# Altium PCB Relay_Controller_REV5.PcbDoc
Units mm, origin at the board's own origin, x right, y up, seen from the top; angles counter-clockwise.
Board outline 129.29 x 167.89 mm, 2 copper layers (Top Layer, Bottom Layer), stack 1.65 mm thick; 44 components, 29 nets, 116 pads, 135 vias.
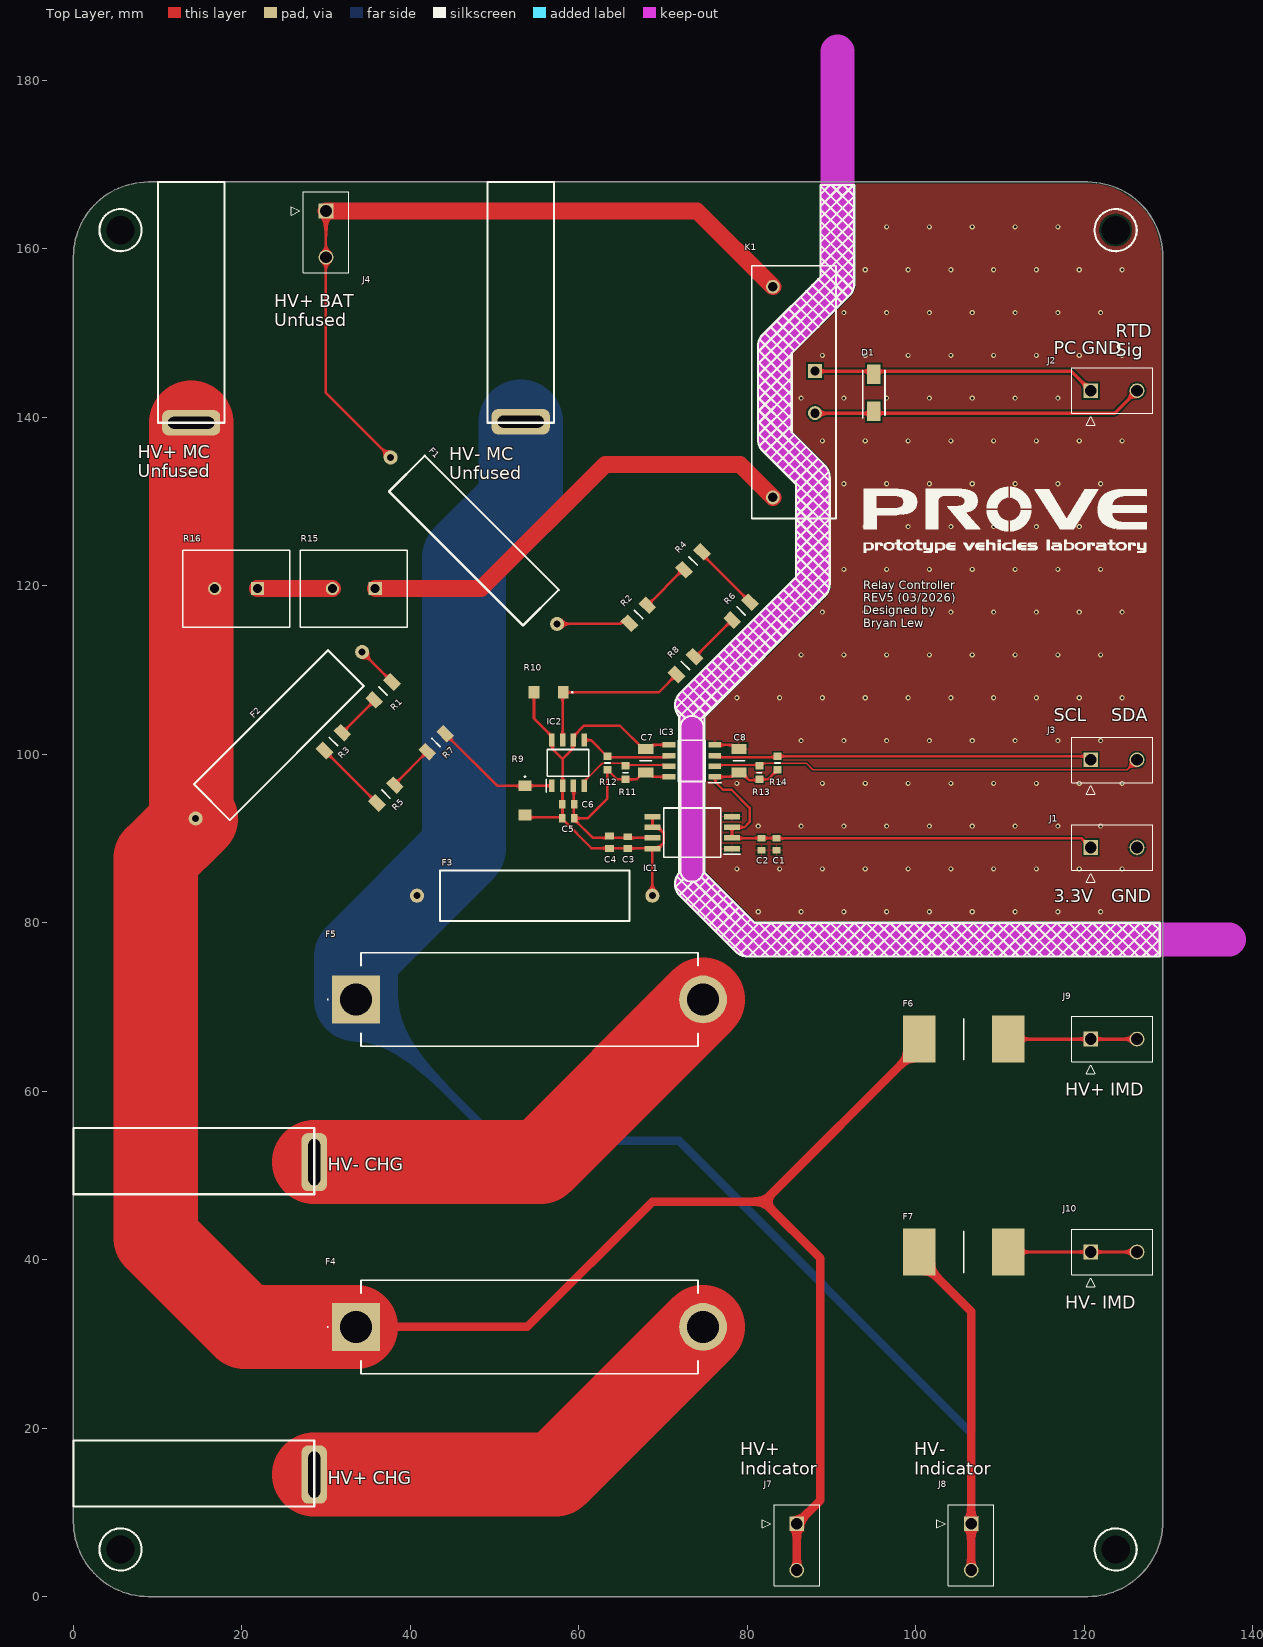
[diagram p0: Top Layer view]
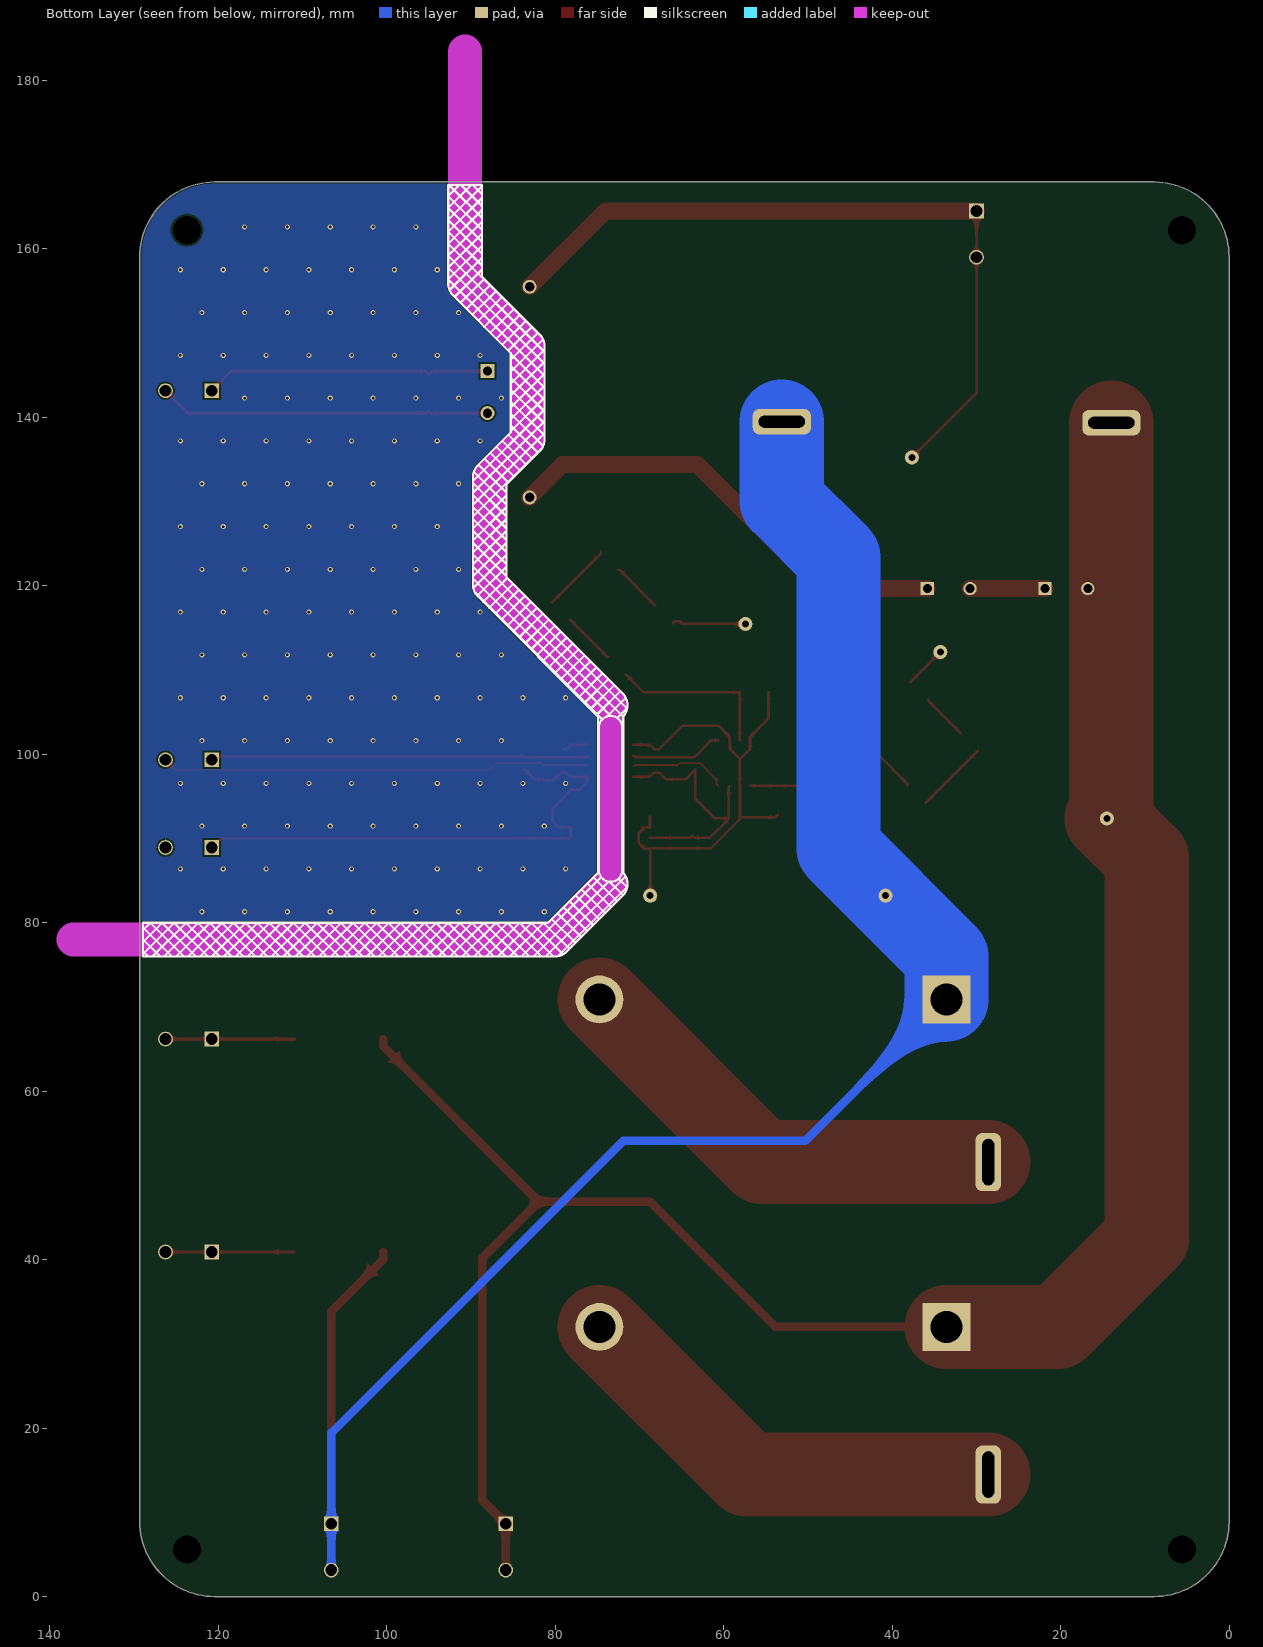
[diagram p1: Bottom Layer view, seen from below]
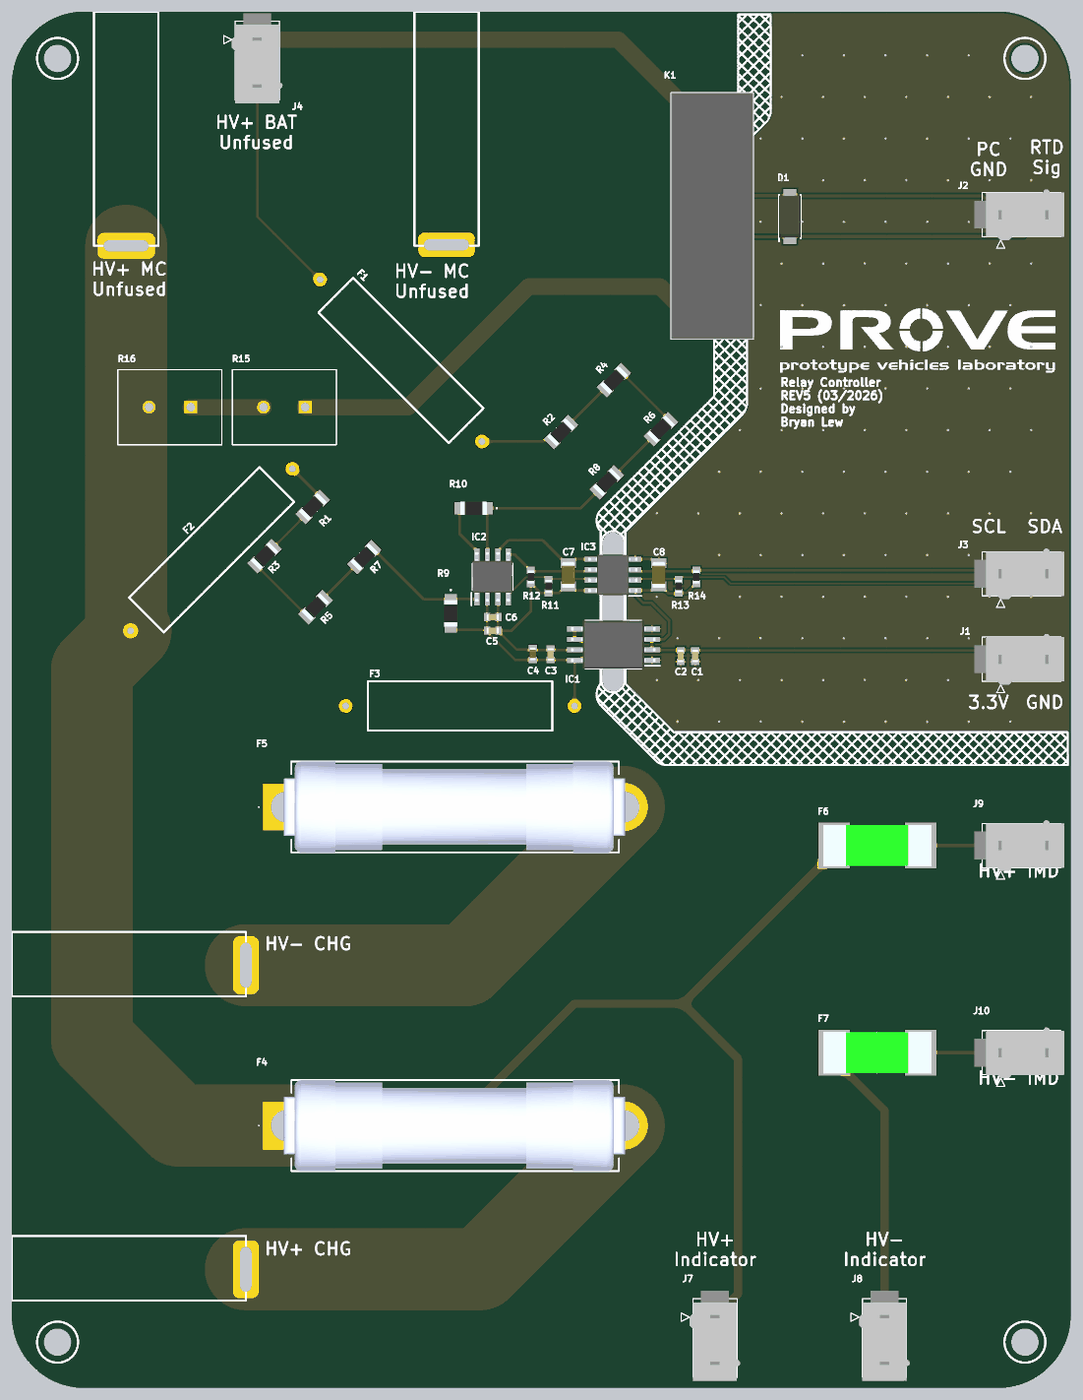
[diagram p2: 3D render of the assembled board from above, using the file's embedded part models]

## Layer stack, top to bottom
Top Solder: solder mask 0.0127, Solder Resist, Dk 3.8
Top Layer: signal copper 0.075
Dielectric: core 1.5, FR-4, Dk 4.5
Bottom Layer: signal copper 0.075
Bottom Solder: solder mask 0.0127, Solder Resist, Dk 3.8

## Board outline
0,8.89 0,159.004 cw(c8.89,159.004) 8.89,167.894 120.396,167.894 cw(c120.396,159.004) 129.286,159.004 129.286,8.89 cw(c120.396,8.89) 120.396,0 8.89,0 cw(c8.89,8.89)
cut-out: 72.156,86.233 ccw(c73.406,86.233) 74.656,86.233 74.656,103.124 ccw(c73.406,103.124) 72.156,103.124

## Design rules (kind name [scope] priority, off if disabled: settings)
BoardOutlineClearance [All] p1: gap=0.2 ignorepadtopadclearanceinfootprint=FALSE
Clearance [All] p1: gap=0.203 ignorepadtopadclearanceinfootprint=FALSE except(0.25: Arc-Hole Track-Hole SMDPad-Hole THPad-Hole Via-Hole Fill-Hole Poly-Hole Region-Hole Text-Hole)
ComponentClearance [All] p1: gap=0.127 collisioncheckmode=3 verticalgap=0.127 showdistances=TRUE
DiffPairsRouting [All] p1: maxlimit=0.381 minlimit=0.203 mostfreqgap=0.203 toplayer_minwidth=0.203 toplayer_maxwidth=25.4 toplayer_prefwidth=0.203 bottomlayer_minwidth=0.203 bottomlayer_maxwidth=25.4 bottomlayer_prefwidth=0.203 maxuncoupledlength=12.7
Height [All] p1: minheight=0 maxheight=1816.048 prefheight=12.7
HoleSize [All] p1: absolutevalues=TRUE maxlimit=6.3 minlimit=0.3 maxpercent=80.000 minpercent=20.000
HoleToHoleClearance [All] p1: gap=0.25 allowstackedmicrovias=FALSE
MinimumAnnularRing [All] p1: minimumring=0.076
MinimumSolderMaskSliver [All] p1: minsoldermaskwidth=0
PlaneClearance [All] p1: clearance=0.203
PlaneConnect PlaneConnectPowerPads [InPadClass('PowerPads')] p1: planeconnectstyle=Direct reliefexpansion=0.508 reliefentries=4 reliefconductorwidth=0.254 reliefairgap=0.254
PlaneConnect [All] p2: pad.planeconnectstyle=Relief pad.reliefexpansion=0.3 pad.reliefentries=4 pad.reliefconductorwidth=0.203 pad.reliefairgap=0.203 via.planeconnectstyle=Direct via.reliefexpansion=0.3 via.reliefentries=4 via.reliefconductorwidth=0.127 via.reliefairgap=0.127
PolygonConnect PolygonConnectPowerPads [All vs (InPadClass('PowerPads'))] p1: connectstyle=Direct reliefconductorwidth=0.254 reliefentries=4 polygonreliefangle="90 Angle" airgapwidth=0.254
PolygonConnect [All] p2: thpad.connectstyle=Relief thpad.reliefconductorwidth=0.203 thpad.reliefentries=4 thpad.polygonreliefangle="90 Angle" thpad.airgapwidth=0.203 smdpad.connectstyle=Relief smdpad.reliefconductorwidth=0.203 smdpad.reliefentries=4 smdpad.polygonreliefangle="90 Angle" smdpad.airgapwidth=0.203 via.connectstyle=Direct via.reliefconductorwidth=0.127 via.reliefentries=4 via.polygonreliefangle="90 Angle" via.airgapwidth=0.127
RoutingVias [All] p1: holewidth=0.3 width=0.6 viastyle="Through Hole" minholewidth=0.3 minwidth=0.6 maxholewidth=0.6 maxwidth=6.6
SilkToSilkClearance [All] p1: silktosilkclearance=0
SilkToSolderMaskClearance [IsPad] p1: minsilkscreentomaskgap=0.127 clearancetoexposedcopper=TRUE
SolderMaskExpansion [All] p1: expansion=0.075 istentingtop=FALSE
SupplyNets "Schematic Supply Nets" [InNet('GND')] p1: voltage=0.000
Width [All] p1: maxlimit=25.4 minlimit=0.203 preferedwidth=0.203 minimp=50.000000 maximp=50.000000 favimp=50.000000
20 further rules are at their usual default settings.

## Classes and differential pairs
component class VoltageSense: C5 C6 C7 C8 IC2 IC3 R1 R2 R3 R4 R5 R6 R7 R8 R9 R10 R11 R12 R13 R14
component class "Relay Controller": D1 K1 R15 R16
component class Connectors: F1 F2 F3 F4 F5 F6 F7 J1 J2 J3 J4 J7 J8 J9 J10
component class "3.3V Isolation": C1 C2 C3 C4 IC1

## Components (designator, comment, footprint, x,y, rotation, side; value= is the part's Value field where it differs from the comment)
C1 "10u" CAPC1608X90N 83.439,89.281 r270 top
C2 "100n" CAPC1608X90N 81.661,89.281 r270 top
C3 "100n" CAPC1608X90N 65.786,89.49 r270 top
C4 "22u" CAPC1608X105N 63.627,89.535 r270 top
C5 "10u" CAPC1608X90N 58.726,92.37 r180 top
C6 "100n" CAPC1608X90N 58.726,94.021 r180 top
C7 "100n" CAPC3216X94N 67.945,99.187 r90 top
C8 "100n" CAPC3216X94N 78.994,99.187 r90 top
D1 "RGF1M-E3_67A" DIOM5426X300N 94.996,142.875 r90 top
F1 "0ADKP0500-RE" 0ADKP0500-RE 47.526,125.321 r135 top
F2 "0ADKP0500-RE" 0ADKP0500-RE 24.384,102.235 r225 top
F3 "0ADKP0500-RE" 0ADKP0500-RE 54.737,83.185 r180 top
F4 "3-151-022" 3151022 33.528,32.004 r0 top
F5 "3-151-022" 3151022 33.528,70.866 r0 top
F6 "0ACJ-1000-TE" FUSC13250X555N 105.664,66.167 r0 top
F7 "0ACJ-1000-TE" FUSC13250X555N 105.664,40.894 r0 top
IC1 "MIE05W0505BGYE-3R-Z" SOIC127P1030X265-8N 73.446,90.673 r180 top
IC2 "MCP3422A1T-E_SN" SOIC127P600X175-8N 58.702,98.944 r90 top
IC3 "ISO1640BQDRQ1" SOIC127P600X175-8N 73.406,99.187 r180 top
J1 "39-28-1023" 39-28-1023 120.738,88.9 r90 top
J2 "39-28-1023" 39-28-1023 120.738,143.129 r90 top
J3 "39-28-1023" 39-28-1023 120.738,99.314 r90 top
J4 "39-28-1023" 39-28-1023 29.972,164.465 r0 top
J7 "39-28-1023" 39-28-1023 85.852,8.636 r0 top
J8 "39-28-1023" 39-28-1023 106.553,8.636 r0 top
J9 "39-28-1023" 39-28-1023 120.738,66.167 r90 top
J10 "39-28-1023" 39-28-1023 120.738,40.894 r90 top
K1 "S8-2405VU" S82405VU 88.011,145.462 r270 top
R1 "510k" RESC3216X75N 36.748,107.487 r45 top
R2 "510k" RESC3216X75N 67.056,116.586 r225 top
R3 "510k" RESC3216X75N 30.861,101.473 r45 top
R4 "510k" RESC3216X75N 73.533,122.936 r225 top
R5 "510k" RESC3216X75N 37.084,95.25 r225 top
R6 "510k" RESC3216X75N 79.248,116.967 r45 top
R7 "510k" RESC3216X75N 43.053,101.346 r225 top
R8 "510k" RESC3216X75N 72.644,110.49 r45 top
R9 "12.1k" ERJS08_U08_(1206) 53.594,94.488 r270 top
R10 "12.1k" ERJS08_U08_(1206) 56.388,107.315 r180 top
R11 "10k" RESC1608X55N 65.532,97.79 r90 top
R12 "10k" RESC1608X55N 63.373,98.933 r90 top
R13 "10k" RESC1608X55N 81.407,97.79 r90 top
R14 "10k" RESC1608X55N 83.566,98.933 r90 top
R15 "820" RES_TWM10_OHM 35.814,119.634 r180 top
R16 "820" RES_TWM10_OHM 21.844,119.634 r180 top

## Footprints (in the part's own frame and the unit in brackets; to place one, negate y for a bottom-side part, rotate by r counter-clockwise, add the part's x,y. Pads: shape width x height; smd on the part's side, far side on the other; paste and mask are expansions set on the pad)
0ADKP0500-RE [mil]
  round 66 hole 33: 1(-550,0) 2(550,0)
  Multi-Layer pour cut-out: -443,118 -443,-118 443,-118 443,118
  silkscreen extent -443,-118 443,118
39-28-1023 [mm]
  rect 1.75x1.75 hole 1.4: 1(0,0)
  round 1.75 hole 1.4: 2(0,-5.5)
  silkscreen extent -4.1,-7.35 2.7,2.25, body extent -3.11,-7.79 3.09,3.21, height 12.62
3151022 [mm]
  rect 5.685x5.685 hole 3.79: 1(0,0)
  round 5.685 hole 3.79: 2(41.2,0)
  silkscreen extent -3.4,-5.55 40.6,5.55, body extent -0.35,-5.55 41.35,5.55, height 12.55
CAPC1608X90N [mm]
  rect 0.78x0.99 smd: 1(-0.7,0) 2(0.7,0)
  body extent -0.76,-0.38 0.76,0.38, height 0.91
CAPC1608X105N [mm]
  rect 0.83x1.07 smd: 1(-0.72,0) 2(0.72,0)
  body extent -0.8,-0.4 0.8,0.4, height 1.05
CAPC3216X94N [mm]
  rect 1.2x1.82 smd: 1(-1.4,0) 2(1.4,0)
  silkscreen extent 0,-0.7 0,0.7, body extent -1.6,-0.8 1.6,0.8, height 0.94
DIOM5426X300N [mm]
  rect 2.3x1.6 smd: 1(-2.2,0) 2(2.2,0)
  silkscreen extent -3,-1.32 2.68,1.32, body extent -2.68,-1.32 2.68,1.32, height 3
ERJS08_U08_(1206) [mm]
  rect 1.25x1.5 smd: 1(-1.725,0) 2(1.725,0)
  silkscreen extent -2.87,-0.05 -2.78,0.05, body extent -1.6,-0.8 1.6,0.8, height 0.6
FUSC13250X555N [mm]
  rect 3.84x5.56 smd: 1(-5.285,0) 2(5.285,0)
  silkscreen extent 0,-2.42 0,2.42, body extent -6.6,-2.52 6.6,2.52, height 5.55
RES_TWM10_OHM [mil]
  rect 62x62 hole 42 paste-99999 mask+0: 1(0,0)
  round 62 hole 42 paste-99999 mask+0: 2(200,0)
  silkscreen extent -150,-180 350,180
RESC1608X55N [mm]
  rect 0.9x0.95 smd: 1(-0.8,0) 2(0.8,0)
  silkscreen extent 0,-0.3 0,0.3, body extent -0.8,-0.4 0.8,0.4, height 0.55
RESC3216X75N [mm]
  rect 1.2x1.8 smd: 1(-1.5,0) 2(1.5,0)
  silkscreen extent 0,-0.7 0,0.7, body extent -1.6,-0.8 1.6,0.8, height 0.75
S82405VU [mm]
  rect 1.65x1.65 hole 1.1: 1(0,0)
  round 1.65 hole 1.1: 2(5,0) 3(-10,-5) 4(15,-5)
  silkscreen extent -12.5,-7.5 17.5,2.5, body extent -12.5,-7.5 17.5,2.5, height 12.1
SOIC127P600X175-8N [mm]
  rect 1.525x0.65 smd: 1(-2.712,1.905) 2(-2.712,0.635) 3(-2.712,-0.635) 4(-2.712,-1.905) 5(2.712,-1.905) 6(2.712,-0.635) 7(2.712,0.635) 8(2.712,1.905)
  silkscreen extent -3.48,-2.45 1.6,2.58, body extent -3,-2.45 3,2.45, height 1.75
SOIC127P1030X265-8N [mm]
  rect 1.925x0.65 smd: 1(-4.712,1.905) 2(-4.712,0.635) 3(-4.712,-0.635) 4(-4.712,-1.905) 5(4.712,-1.905) 6(4.712,-0.635) 7(4.712,0.635) 8(4.712,1.905)
  silkscreen extent -5.67,-2.92 3.4,2.92, body extent -5.15,-2.93 5.15,2.93, height 2.65

## Part data
C1 C5: library part CL10A106KQ8NNNL, "Capacitor", Manufacturer_Name=SAMSUNG, Mouser Part Number=N/A, Arrow Part Number=CL10A106KQ8NNNL, Arrow Price/Stock=https://www.arrow.com/en/products/cl10a106kq8nnnl/samsung-electro-mechanics, Datasheet Link=https://product.samsungsem.com/mlcc/basic-search.do?partNumber=CL10A106KQ8NNN, Height=0.9mm, Manufacturer_Part_Number=CL10A106KQ8NNNL, Mouser Price/Stock=https://www.mouser.com/Search/Refine.aspx?Keyword=N%2FA
C2 C3 C6: library part 06035C104J4Z2A, "Capacitor", Manufacturer_Name="Kyocera AVX", Mouser Part Number=581-06035C104J4Z2A, Arrow Part Number=06035C104J4Z2A, Arrow Price/Stock=https://www.arrow.com/en/products/06035c104j4z2a/avx, Datasheet Link=https://componentsearchengine.com/Datasheets/1/06031A100FAT2A.pdf, Height=0.9mm, Manufacturer_Part_Number=06035C104J4Z2A, Mouser Price/Stock=https://www.mouser.co.uk/ProductDetail/KYOCERA-AVX/06035C104J4Z2A?qs=Awwwc1gvTnlncvTGCFZvkw%3D%3D
C4: library part CL10A226MP8NUNE, "Capacitor", Manufacturer_Name=SAMSUNG, Mouser Part Number=187-CL10A226MP8NUNE, Arrow Part Number=CL10A226MP8NUNE, Arrow Price/Stock=https://www.arrow.com/en/products/cl10a226mp8nune/samsung-electro-mechanics?utm_currency=USD&region=europe, Datasheet Link=https://datasheet.datasheetarchive.com/originals/distributors/Datasheets-DGA10/2407063.pdf, Height=1.05mm, Manufacturer_Part_Number=CL10A226MP8NUNE, Mouser Price/Stock=https://www.mouser.co.uk/ProductDetail/Samsung-Electro-Mechanics/CL10A226MP8NUNE?qs=gRKWieUq2Hb5O0PTfRKzDQ%3D%3D
C7 C8: library part 12065C104J4Z2A, "Capacitor", Manufacturer_Name="Kyocera AVX", Mouser Part Number=581-12065C104J4Z2A, Datasheet Link=https://spicat.kyocera-avx.com/product/mlcc/chartview/12065C104J4Z2A/DataSheet/X7R, Height=0.94mm, Manufacturer_Part_Number=12065C104J4Z2A, Mouser Price/Stock=https://www.mouser.com/Search/Refine.aspx?Keyword=581-12065C104J4Z2A
D1: "Diode", Arrow Part Number=RGF1M-E3/67A, Manufacturer_Name=Vishay, Mouser Part Number=625-RGF1M-E3, Arrow Price/Stock=https://www.arrow.com/en/products/rgf1m-e367a/vishay?region=nac, Datasheet Link=https://www.vishay.com/docs/88697/rgf1.pdf, Height=3mm, Manufacturer_Part_Number=RGF1M-E3/67A, Mouser Price/Stock=https://www.mouser.co.uk/ProductDetail/Vishay-General-Semiconductor/RGF1M-E3-67A?qs=4xyK702%2F%252BQ1dl%252BTCdyIThg%3D%3D
F1 F2 F3: "Fuse"
F4 F5: "Fuse", Manufacturer_Name=SCHURTER, Datasheet Link=https://www.schurter.com/en/datasheet/AMO_10.3x38, Manufacturer_Part_Number=3-151-022
F6 F7: "Fuse", Manufacturer_Name=BelFuse, Mouser Part Number=530-0ACJ-1000-TE, Arrow Part Number=0ACJ-1000-TE, Arrow Price/Stock=https://www.arrow.com/en/products/0acj-1000-te/bel-group?utm_currency=USD&region=nac, Datasheet Link=https://www.mouser.de/datasheet/2/643/ds_CP_0ACJ_series-3045709.pdf, Height=5.55mm, Manufacturer_Part_Number=0ACJ-1000-TE, Mouser Price/Stock=https://www.mouser.co.uk/ProductDetail/Bel-Fuse/0ACJ-1000-TE?qs=T%252BzbugeAwjiHfega9XRYqg%3D%3D
IC2: "Integrated Circuit", Arrow Part Number=MCP3422A1T-E/SN, Manufacturer_Name=Microchip, Mouser Part Number=579-MCP3422A1T-E/SN, Arrow Price/Stock=https://www.arrow.com/en/products/mcp3422a1t-esn/microchip-technology, Datasheet Link=https://ww1.microchip.com/downloads/en/DeviceDoc/22088c.pdf, Height=1.75mm, Manufacturer_Part_Number=MCP3422A1T-E/SN, Mouser Price/Stock=https://www.mouser.co.uk/ProductDetail/Microchip-Technology/MCP3422A1T-E-SN?qs=X98pPdo4MrvBbe3HwfJ%252Bfw%3D%3D
IC3: "Integrated Circuit", Manufacturer_Name="Texas Instruments", Mouser Part Number=595-ISO1640BQDRQ1, Arrow Part Number=ISO1640BQDRQ1, Arrow Price/Stock=https://www.arrow.com/en/products/iso1640bqdrq1/texas-instruments?region=nac, Datasheet Link=https://www.ti.com/lit/ds/symlink/iso1640.pdf, Height=1.75mm, Manufacturer_Part_Number=ISO1640BQDRQ1, Mouser Price/Stock=https://www.mouser.co.uk/ProductDetail/Texas-Instruments/ISO1640BQDRQ1?qs=QNEnbhJQKvat3Z1mRPODGw%3D%3D
J1 J2 J3 J4 J7 J8 J9 J10: "Connector", Manufacturer_Name=Molex, Mouser Part Number=538-39-28-1023, Arrow Part Number=39-28-1023, Arrow Price/Stock=https://www.arrow.com/en/products/39-28-1023/molex?region=nac, Datasheet Link=https://www.molex.com/pdm_docs/sd/039281023_sd.pdf, Height=12.8mm, Manufacturer_Part_Number=39-28-1023, Mouser Price/Stock=https://www.mouser.co.uk/ProductDetail/Molex/39-28-1023?qs=LQQHZ4xw2XBykFU0jRHvlQ%3D%3D
K1: "Relay or Contactor", Manufacturer_Name=Sensata, Mouser Part Number=285-S8-2405VU, Datasheet Link=https://componentsearchengine.com/Datasheets/2/S8-2405VU.pdf, Height=12mm, Manufacturer_Part_Number=S8-2405VU, Mouser Price/Stock=https://www.mouser.co.uk/ProductDetail/Cynergy3/S8-2405VU?qs=OlC7AqGiEDkSZm1DfbwcWw%3D%3D
R1 R2 R3 R4 R5 R6 R7 R8: library part CR1206-FX-5103ELF, "Resistor", Manufacturer_Name=Bourns, Mouser Part Number=652-CR1206FX-5103ELF, Arrow Part Number=CR1206-FX-5103ELF, Arrow Price/Stock=https://www.arrow.com/en/products/cr1206-fx-5103elf/bourns?region=europe, Datasheet Link=http://componentsearchengine.com/Datasheets/1/CR1206-FX-5103ELF.pdf, Height=0.75mm, Manufacturer_Part_Number=CR1206-FX-5103ELF, Mouser Price/Stock=https://www.mouser.co.uk/ProductDetail/Bourns/CR1206-FX-5103ELF?qs=O4EQhShwvrpqwloF6Ll%2FVg%3D%3D
R9 R10: library part ERJ-S08F1212V, "Resistor", Manufacturer_Name=Panasonic, Mouser Part Number=667-ERJ-S08F1212V, Datasheet Link=http://industrial.panasonic.com/cdbs/www-data/pdf/RDP0000/AOA0000C334.pdf, Height=0.7mm, Manufacturer_Part_Number=ERJ-S08F1212V, Mouser Price/Stock=https://www.mouser.co.uk/ProductDetail/Panasonic/ERJ-S08F1212V?qs=Zyl8A9hlmJoa%2FmRL4TNL9g%3D%3D
R11 R12 R13 R14: library part CRGCQ0603F10K, "Resistor", Manufacturer_Name="TE Connectivity", Mouser Part Number=279-CRGCQ0603F10K, Arrow Part Number=CRGCQ0603F10K, Arrow Price/Stock=https://www.arrow.com/en/products/crgcq0603f10k/te-connectivity?region=nac, Datasheet Link=https://www.te.com/commerce/DocumentDelivery/DDEController?Action=showdoc&DocId=Data+Sheet%7F1773204-3%7F1%7Fpdf%7FEnglish%7FENG_DS_1773204-3_1.pdf%7F5-2176339-2, Height=0.55mm, Manufacturer_Part_Number=CRGCQ0603F10K, Mouser Price/Stock=https://www.mouser.co.uk/ProductDetail/TE-Connectivity-Holsworthy/CRGCQ0603F10K?qs=wUXugUrL1qxhM765MzQWJg%3D%3D
R15 R16: library part TWW10J820E, "No Description Available", Manufacturer_Name=Ohmite, Copyright="Copyright (C) 2025 Ultra Librarian. All rights reserved.", Manufacturer_Part_Number=TWW10J820E

## Free pads (board coordinates)
  round 1.524 hole 3.35 unplated: 1(5.588,5.588) 1(5.588,162.179) 1(123.698,5.588) 1(123.698,162.179)
  rrect50% 6.9x3 hole 1.4 slot 5.5 at 0 deg: 2(13.97,139.319) 2(53.086,139.446)
  rrect50% 3x6.9 hole 1.4 slot 5.5 at 90 deg: 2(28.575,14.478) 2(28.575,51.562)

## Via types
v1: diameter 0.61, hole 0.3, Top Layer to Bottom Layer, tented both sides, 135 vias

## Nets (pads, with @x,y where several pads share a name; then routed paths per layer and width w, separated by ;. In a path a pad name is that pad's centre, name@x,y a point inside that pad or via, vN(x,y) a via of type N, cw(c..) or ccw(c..) an arc to the next point about the centre after c; other vN are vias at no path point)
3.3V: C1.1 C2.1 C8.1 IC1.2 IC1.3 IC3.1 J1.1 R13.1 R14.1 | length 62.9
  Top Layer w0.3: C1.1 119.657,89.981 J1.1 ; C1.1@83.439,90.01 81.661,90.01 78.187,90.01 IC1.2 IC1.3 79.624,91.308 80.264,91.948 80.264,93.599 78.105,95.758 77.089,95.758 76.2,96.647 76.2,97.107 76.118,97.189 IC3.1 78.179,97.282 78.684,97.787 C8.1 79.304,97.787 80.19,96.901 81.318,96.901 R13.1 82.423,96.99 83.291,97.858 83.291,97.883 83.541,98.133 R14.1
"3.3V (High Side)": C3.1 C4.1 C5.1 C6.1 C7.1 IC1.7 IC2.3 IC3.8 R11.1 R12.1 | length 30.9
  Top Layer w0.3: IC2.3 59.382,96.187 59.382,94.021 59.382,92.31 61.649,90.043 63.415,90.043 C4.1 ; C5.1 61.001,92.37 63.373,94.742 R12.1 ; R12.1@63.398,98.133 64.541,96.99 R11.1 66.838,96.99 67.635,97.787 C7.1 68.255,97.787 68.76,97.282 IC3.8 ; C4.1@63.747,90.255 63.964,90.038 IC1.7
GND: C1.2 C2.2 C8.2 IC1.1 IC1.4 IC3.4 J1.2 | length 3.1
  Top Layer w0.3: IC3.4 78.179,101.092 78.684,100.587 C8.2
  other v1: 81.28,81.28 86.36,81.28 91.44,81.28 96.52,81.28 101.6,81.28 106.68,81.28 111.76,81.28 116.84,81.28 121.92,81.28 78.74,86.36 83.82,86.36 88.9,86.36 93.98,86.36 99.06,86.36 104.14,86.36 109.22,86.36 114.3,86.36 119.38,86.36 124.46,86.36 81.28,91.44 86.36,91.44 91.44,91.44 96.52,91.44 101.6,91.44 106.68,91.44 111.76,91.44 116.84,91.44 121.92,91.44 78.74,96.52 83.82,96.52 88.9,96.52 93.98,96.52 99.06,96.52 104.14,96.52 109.22,96.52 114.3,96.52 119.38,96.52 124.46,96.52 86.36,101.6 91.44,101.6 96.52,101.6 101.6,101.6 106.68,101.6 111.76,101.6 116.84,101.6 121.92,101.6 78.74,106.68 83.82,106.68 88.9,106.68 93.98,106.68 99.06,106.68 104.14,106.68 109.22,106.68 114.3,106.68 119.38,106.68 124.46,106.68 86.36,111.76 91.44,111.76 96.52,111.76 101.6,111.76 106.68,111.76 111.76,111.76 116.84,111.76 121.92,111.76 88.9,116.84 93.98,116.84 99.06,116.84 104.14,116.84 109.22,116.84 114.3,116.84 119.38,116.84 124.46,116.84 91.44,121.92 96.52,121.92 101.6,121.92 106.68,121.92 111.76,121.92 116.84,121.92 121.92,121.92 93.98,127 99.06,127 104.14,127 109.22,127 114.3,127 119.38,127 124.46,127 91.44,132.08 96.52,132.08 101.6,132.08 106.68,132.08 111.76,132.08 116.84,132.08 121.92,132.08 88.9,137.16 93.98,137.16 99.06,137.16 104.14,137.16 109.22,137.16 114.3,137.16 119.38,137.16 124.46,137.16 86.36,142.24 91.44,142.24 96.52,142.24 101.6,142.24 106.68,142.24 111.76,142.24 116.84,142.24 88.9,147.32 93.98,147.32 99.06,147.32 104.14,147.32 109.22,147.32 114.3,147.32 119.38,147.32 124.46,147.32 91.44,152.4 96.52,152.4 101.6,152.4 106.68,152.4 111.76,152.4 116.84,152.4 121.92,152.4 93.98,157.48 99.06,157.48 104.14,157.48 109.22,157.48 114.3,157.48 119.38,157.48 124.46,157.48 96.52,162.56 101.6,162.56 106.68,162.56 111.76,162.56 116.84,162.56
"HV+ BAT Divided": IC2.7 R8.1 R10.1 | length 20.1
  Top Layer w0.3: IC2.7 R10.1@58.067,107.394 ; R10.1 69.469,107.315 R8.1
"HV+ BAT Sense": F1.1 R2.2 | length 8.8
  Top Layer w0.3: F1.1 64.852,115.443 65.147,115.737 65.783,115.737 R2.2
"HV+ BAT Unfused": F1.2 J4.1 J4.2 K1.3 | length 89.2
  Top Layer w0.3: J4.1 J4.2 29.972,142.875 F1.2
  Top Layer w2: J4.1 70.057,164.465 74.008,164.465 K1.3
"HV+ CHG": F4.2 pad.2@28.575,14.478 | length 53.4
  Top Layer w10: pad.2@28.575,14.478 57.202,14.478 F4.2
"HV+ IMD": F6.2 J9.1 J9.2 | length 15.3
  Top Layer w0.4: F6.2 J9.2
"HV+ MC": F2.1 R1.2 | length 5
  Top Layer w0.3: F2.1 37.808,108.567 R1.2
"HV+ MC Divided": IC2.1 R7.1 R9.1 | length 15.3
  Top Layer w0.3: R7.1 50.307,96.213 R9.1 53.612,96.232 IC2.1
"HV+ MC Unfused": F2.2 F4.1 F6.1 J7.1 J7.2 pad.2@13.97,139.319 R16.2 | length 256
  Top Layer w1: F4.1 53.848,32.004 68.707,46.863 81.935,46.863 ; J7.2 J7.1 88.646,11.43 88.646,40.152 81.935,46.863 ; F6.1 100.379,65.307 81.935,46.863
  Top Layer w10: F2.2@13.97,92.357 13.97,119.634 pad.2@13.97,139.319 ; F2.2 9.779,87.63 9.779,42.545 20.32,32.004 F4.1
HV-: C3.2 C4.2 C5.2 C6.2 C7.2 F3.1 IC1.5 IC1.6 IC1.8 IC2.2 IC2.6 IC2.8 IC3.5 R9.2 R10.2 | length 60.8
  Top Layer w0.3: R9.2 53.882,92.475 57.921,92.475 C5.2 58.046,92.391 58.046,92.475 58.046,96.211 IC2.2 58.067,99.38 58.05,99.396 ; R10.2 54.663,104.227 56.862,102.028 56.862,100.585 58.05,99.396 ; C5.2@58.026,92.265 61.477,88.815 C4.2 63.65,88.792 68.711,88.792 IC1.8 ; F3.1 68.707,88.741 IC1.8 ; IC1.6 69.371,91.308 70.05,90.63 70.05,89.447 69.371,88.768 IC1.8 ; IC3.5 68.76,101.092 68.255,100.587 C7.2 67.635,100.587 64.844,103.378 60.622,103.378 59.337,102.093 IC2.6 59.255,101.574 59.255,100.601 58.05,99.396
  Top Layer w0.4: IC1.6 IC1.5
"HV- CHG": F5.2 pad.2@28.575,51.562 | length 54.1
  Top Layer w10: pad.2@28.575,51.562 55.424,51.562 F5.2
"HV- IMD": F7.2 J10.1 J10.2 | length 15.3
  Top Layer w0.4: F7.2 J10.1 J10.2
"HV- MC Unfused": F3.2 F5.1 F7.1 J8.1 J8.2 pad.2@53.086,139.446 | length 227.6
  Top Layer w1: F7.1 100.379,40.034 106.553,33.86 J8.1 J8.2
  Bottom Layer w1: F5.1 50.292,54.102 71.882,54.102 106.553,19.431 J8.1 J8.2
  Bottom Layer w10: F5.1 33.528,75.946 46.355,88.773 46.355,123.317 53.086,130.048 pad.2@53.086,139.446
NetK1_4: K1.4 R15.1 | length 54.9
  Top Layer w2: R15.1 48.387,119.634 63.119,134.366 79.107,134.366 K1.4
NetR1_1: R1.1 R3.2 | length 5.5
  Top Layer w0.3: R3.2 35.687,106.299 R1.1
NetR2_1: R2.1 R4.2 | length 6.1
  Top Layer w0.3: R2.1 72.345,121.875 R4.2
NetR3_1: R3.1 R5.2 | length 8.8
  Top Layer w0.3: R3.1 R5.2
NetR4_1: R4.1 R6.2 | length 8.3
  Top Layer w0.3: R4.1 74.594,123.743 R6.2
NetR5_1: R5.1 R7.2 | length 5.6
  Top Layer w0.3: R5.1 38.145,96.438 R7.2
NetR6_1: R6.1 R8.2 | length 6.3
  Top Layer w0.3: R8.2 73.832,111.551 R6.1
NetR15_2: R15.2 R16.1 | length 8.9
  Top Layer w2: R16.1 R15.2
"Precharge Relay GND": D1.2 J2.1 K1.1 | length 33.9
  Top Layer w0.4: K1.1@88.058,145.429 94.642,145.429 D1.2 95.336,145.415 118.452,145.415 J2.1
RTD_Sig: D1.1 J2.2 K1.2 | length 39.5
  Top Layer w0.4: K1.2@88.058,140.429 94.75,140.429 D1.1 95.209,140.462 123.571,140.462 J2.2
SCL: IC3.3 J3.1 R14.2 | length 44.7
  Top Layer w0.3: IC3.3 76.293,99.647 76.893,99.647 76.906,99.634 83.467,99.634 R14.2 J3.1@120.738,99.733
"SCL (High Side)": IC2.5 IC3.6 R12.2 | length 11
  Top Layer w0.3: IC2.5 61.425,101.656 63.348,99.733 R12.2 63.472,99.634 69.906,99.634 69.919,99.647 70.519,99.647 IC3.6
SDA: IC3.2 J3.2 R13.2 | length 51.1
  Top Layer w0.203: IC3.2 76.258,98.692 81.305,98.692 R13.2 81.705,98.888 87.009,98.888 87.762,98.134 125.058,98.134 J3.2
"SDA (High Side)": IC2.4 IC3.7 R11.2 | length 11.7
  Top Layer w0.203: IC2.4 60.83,96.455 60.83,96.946 62.772,98.888 65.234,98.888 R11.2 65.634,98.692 70.554,98.692 IC3.7

## Polygon pours and split planes (outlines as drawn)
GND on Top Layer "GND_L01_P000" (solid, pour order 0): 90.805,155.575 83.185,147.955 83.185,137.033 87.757,132.461 87.757,119.507 73.533,105.283 73.533,84.455 80.391,77.597 129.286,77.597 129.286,167.894 90.805,167.894
no net on Top Overlay "NONET_L-01_P-001" (hatched 45Degree grid 1 track 0.254): 78.596,76.564 71.992,83.168 cw(c73.406,84.582) 71.906,85.905 71.906,104.468 cw(c73.406,105.791) 71.992,107.205 85.757,120.971 85.757,132.013 81.834,135.936 cw(c83.248,137.35) 81.248,137.35 81.248,148.399 cw(c83.248,148.399) 81.834,149.814 88.678,156.658 88.678,183.388 cw(c90.678,183.388) 92.678,183.388 92.678,155.829 cw(c90.678,155.829) 92.092,154.415 85.249,147.571 85.249,138.179 89.171,134.256 cw(c87.757,132.842) 89.757,132.842 89.757,120.142 cw(c87.757,120.142) 89.171,118.728 74.906,104.462 74.906,85.911 80.839,79.978 137.16,79.978 cw(c137.16,77.978) 139.16,77.978 cw(c137.16,77.978) 137.16,75.978 80.01,75.978 cw(c80.01,77.978)
GND on Bottom Layer "GND_L02_P001" (solid, pour order 1): 90.805,155.575 83.185,147.955 83.185,137.033 87.757,132.461 87.757,119.507 73.533,105.283 73.533,84.455 80.391,77.597 129.286,77.597 129.286,167.894 90.805,167.894
no net on Bottom Overlay "NONET_L-01_P-001" (hatched 45Degree grid 1 track 0.254): 78.596,76.564 71.992,83.168 cw(c73.406,84.582) 71.906,85.905 71.906,104.468 cw(c73.406,105.791) 71.992,107.205 85.757,120.971 85.757,132.013 81.834,135.936 cw(c83.248,137.35) 81.248,137.35 81.248,148.399 cw(c83.248,148.399) 81.834,149.814 88.678,156.658 88.678,183.388 cw(c90.678,183.388) 92.678,183.388 92.678,155.829 cw(c90.678,155.829) 92.092,154.415 85.249,147.571 85.249,138.179 89.171,134.256 cw(c87.757,132.842) 89.757,132.842 89.757,120.142 cw(c87.757,120.142) 89.171,118.728 74.906,104.462 74.906,85.911 80.839,79.978 137.16,79.978 cw(c137.16,77.978) 139.16,77.978 cw(c137.16,77.978) 137.16,75.978 80.01,75.978 cw(c80.01,77.978)

## Keep-outs
Keep-Out Layer:
  lines w3: 73.406,84.582 73.406,105.791
  lines w4: 73.406,84.582 80.01,77.978 137.16,77.978 ; 73.406,105.791 87.757,120.142 87.757,132.842 83.248,137.35 83.248,148.399 90.678,155.829 90.678,183.388

## Silkscreen, mask and mechanical layers (free items; w line width, h text height)
Top Overlay:
  drawing of 57 lines, arcs and shapes, not listed
  text "HV+ BAT / Unfused" at 23.812,150.749 h1.52
  text "PC GND" at 116.333,147.447 h1.52
  text "RTD / Sig" at 123.699,147.193 h1.52
  text "HV+ MC / Unfused" at 7.622,132.842 h1.52
  text "HV- MC / Unfused" at 44.579,132.588 h1.52
  text "Relay Controller / REV5 (03/2026) / Designed by / Bryan Lew" at 93.726,115.062 h1
  text "SCL" at 116.333,103.886 h1.52
  text "SDA" at 123.191,103.886 h1.52
  text "3.3V" at 116.333,82.423 h1.52
  text "GND" at 123.191,82.423 h1.52
  text "HV+ IMD" at 117.706,59.436 h1.52
  text "HV- CHG" at 30.162,50.546 h1.52
  text "HV- IMD" at 117.706,34.163 h1.52
  text "HV+ / Indicator" at 79.123,14.478 h1.52
  text "HV- / Indicator" at 99.824,14.478 h1.52
  text "HV+ CHG" at 30.162,13.335 h1.52
Bottom Overlay:
  pour cut-out: 72.156,86.233 ccw(c73.406,86.233) 74.656,86.233 74.656,103.124 ccw(c73.406,103.124) 72.156,103.124
Mechanical 1:
  the board outline again, w0.254
Mechanical 13:
  lines w2.5: 73.406,86.233 73.406,103.124